# Altium PCB PCB1.PcbDoc
Units mm, origin at the board's own origin, x right, y up, seen from the top; angles counter-clockwise.
Board outline 40 x 100 mm, 2 copper layers (Top Layer, Bottom Layer); 29 components, 22 nets, 85 pads, 5 vias.
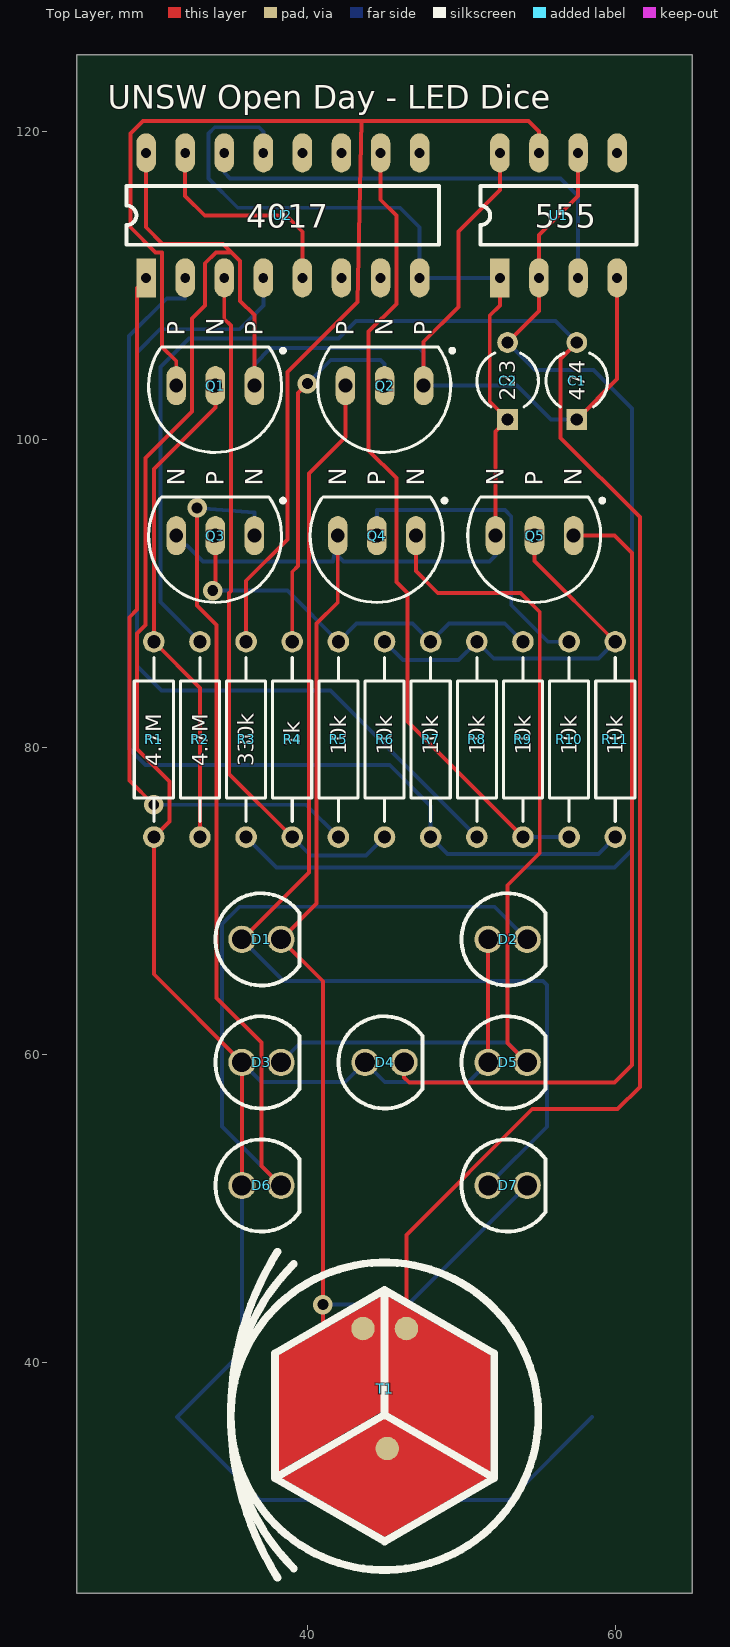
[diagram p0: Top Layer view]
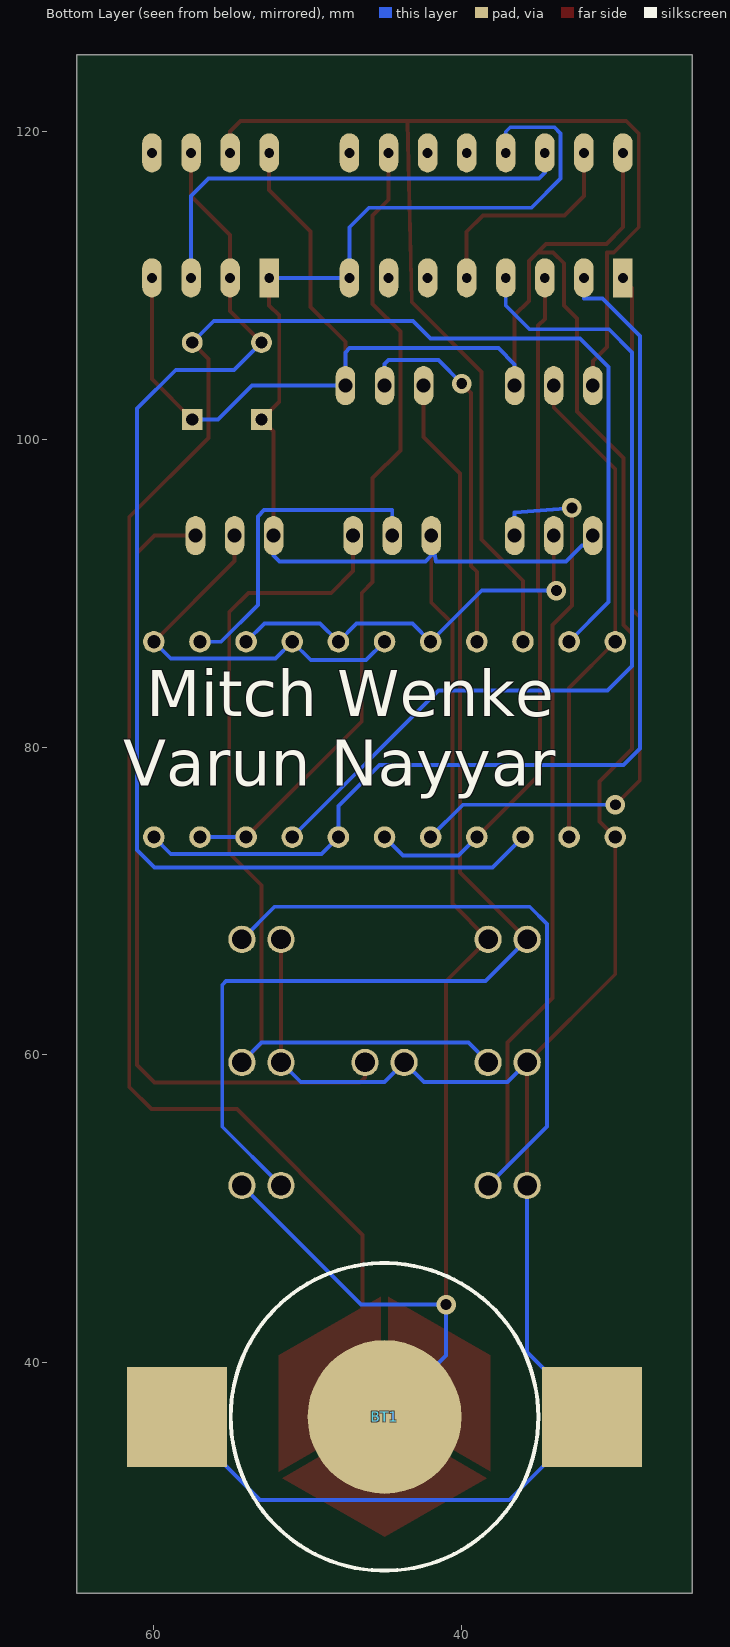
[diagram p1: Bottom Layer view, seen from below]

## Layer stack, top to bottom
Top Layer: signal copper 0.0356
Dielectric: dielectric 0.32, FR-4, Dk 4.8
Bottom Layer: signal copper 0.0356

## Board outline
25,25 65,25 65,125 25,125 25,25

## Design rules (kind name [scope] priority, off if disabled: settings)
AssemblyTestPointUsage [All] p1 off:
AssemblyTestpoint [All] p1 off: testpointundercomponent=TRUE minsize=1.016 maxsize=2.54 preferedsize=1.524 minholesize=0 maxholesize=1.016 preferedholesize=0.813 testpointgrid=0.025 usegrid=TRUE gridtolerance=0 allowsidetop=TRUE allowsidebottom=TRUE
Clearance [All] p1: gap=0.254
FabricationTestPointUsage [All] p1 off: valid=0 allowmultiple=FALSE
FabricationTestpoint [All] p1 off: side=3 testpointundercomponent=TRUE minsize=1.016 maxsize=2.54 preferedsize=1.524 minholesize=0 maxholesize=1.016 preferedholesize=0.813 testpointgrid=0.025 allowsidetop=TRUE allowsidebottom=TRUE usegrid=TRUE gridtolerance=0
PolygonConnect [All] p1: connectstyle=Relief reliefconductorwidth=0.254 reliefentries=4 polygonreliefangle="90 Angle"
RoutingVias [All] p1: holewidth=0.711 width=1.27 viastyle="Through Hole" minholewidth=0.711 minwidth=1.27 maxholewidth=0.711 maxwidth=1.27
SilkscreenOverComponentPads [All] p1: minsilkscreentomaskgap=0.029
SolderMaskExpansion [All] p1: expansion=0.102
Width [All] p1: maxlimit=2.54 minlimit=0.254 preferedwidth=0.254
23 further rules are at their usual default settings.

## Components (designator, comment, footprint, x,y, rotation, side; value= is the part's Value field where it differs from the comment)
BT1 "Battery" "CR2032 CLIP" 45,36.456 r0 bottom
C1 "Cap Pol2" CAPR5-4X5 57.5,103.8 r90 top
C2 "Cap" CAPR5-4X5 53,103.8 r90 top
D1 "LED" LED 37,67.5 r0 top
D2 "LED" LED 53,67.5 r0 top
D3 "LED" LED 37,59.5 r0 top
D4 "LED" LED 45,59.5 r0 top
D5 "LED" LED 53,59.5 r0 top
D6 "LED" LED 37,51.5 r0 top
D7 "LED" LED 53,51.5 r0 top
Q1 "BC557" PNP 34,103.5 r90 top
Q2 "BC557" PNP 45,103.5 r90 top
Q3 "BC547" NPN 34,93.75 r90 top
Q4 "BC547" NPN 44.5,93.75 r90 top
Q5 "BC547" NPN 54.75,93.75 r90 top
R1 "Res1" AXIAL-0.5 30,80.5 r270 top
R2 "Res1" AXIAL-0.5 33,80.5 r270 top
R3 "Res1" AXIAL-0.5 36,80.5 r90 top
R4 "Res1" AXIAL-0.5 39,80.5 r90 top
R5 "Res1" AXIAL-0.5 42,80.5 r90 top
R6 "Res1" AXIAL-0.5 45,80.5 r90 top
R7 "Res1" AXIAL-0.5 48,80.5 r90 top
R8 "Res1" AXIAL-0.5 51,80.5 r90 top
R9 "Res1" AXIAL-0.5 54,80.5 r90 top
R10 "Res1" AXIAL-0.5 57,80.5 r90 top
R11 "Res1" AXIAL-0.5 60,80.5 r90 top
T1 "TOUCH" PCBComponent_1 45,36.5 r0 top
U1 "555" 555 52.5,110.5 r90 top
U2 "CD4017" CD4017 29.5,110.5 r90 top

## Footprints (in the part's own frame and the unit in brackets; to place one, negate y for a bottom-side part, rotate by r counter-clockwise, add the part's x,y. Pads: shape width x height; smd on the part's side, far side on the other; paste and mask are expansions set on the pad)
555 [mil]
  rect 100x50 hole 25: 1(0,0)
  oval 100x50 hole 25: 2(0,-100) 3(0,-200) 4(0,-300) 5(320,-300) 6(320,-200) 7(320,-100) 8(320,0)
  silkscreen extent 85,-350 235,50
AXIAL-0.5 [mm] "Axial Device, Thru-Hole; 2 Leads; 0.5 in Pin Spacing"
  round 1.4 hole 0.85: 1(-6.35,0) 2(6.35,0)
  silkscreen extent -5.33,-1.27 5.33,1.27
CAPR5-4X5 [mm] "Capacitor; 2 Leads"
  rect 1.35x1.35 hole 0.8: 1(-2.5,0)
  round 1.35 hole 0.8: 2(2.5,0)
  silkscreen extent -1.69,-2 1.82,2
CD4017 [mil]
  rect 100x50 hole 25: 1(0,0)
  oval 100x50 hole 25: 2(0,-100) 3(0,-200) 4(0,-300) 5(0,-400) 6(0,-500) 7(0,-600) 8(0,-700) 9(320,-700) 10(320,-600) 11(320,-500) 12(320,-400) 13(320,-300) 14(320,-200) 15(320,-100) 16(320,0)
  silkscreen extent 85,-750 235,50
"CR2032 CLIP" [mm]
  rect 6.5x6.5 smd: 1(-13.5,0) 1(13.5,0)
  round 10 smd: 2(0,0)
  silkscreen extent -10,-10 10,10
LED [mil]
  round 70 hole 50: 1(-50,0) 2(50,0)
  silkscreen extent -118,-118 97,118
NPN [mm]
  oval 2.54x1.27 hole 0.9: 1(0,-2.54) 2(0,0) 3(0,2.54)
  silkscreen extent -4.34,-4.52 2.5,4.34
PCBComponent_1 [mm]
  round 1.524 smd: 1(-1.4,5.7) 1(0.175,-2.1) 2(1.425,5.7)
  Top Layer region: -6.65,-4.025 0,-0.175 6.65,-4.025 0,-7.85
  Top Layer region: 0.25,7.775 6.875,3.95 6.875,-3.6 0.25,0.225
  Top Layer region: -0.25,7.775 -0.25,0.25 -6.875,-3.575 -6.875,3.95
  silkscreen extent -10,-10.5 10,10.7
PNP [mm]
  oval 2.54x1.27 hole 0.9: 1(0,-2.54) 2(0,0) 3(0,2.54)
  silkscreen extent -4.34,-4.52 2.5,4.34

## Part data
BT1: "Multicell Battery"
C1: "Polarized Capacitor (Axial)"
C2: "Capacitor"
D1 D2 D3 D4 D5 D6 D7: library part LED0, "Typical INFRARED GaAs LED"
Q1 Q2: library part 2N3906, "PNP General Purpose Amplifier"
Q3 Q4 Q5: library part NPN, "NPN Bipolar Transistor"
R1 R2 R3 R4 R5 R6 R7 R8 R9 R10 R11: "Resistor"

## Via types
v1: diameter 1.27, hole 0.711, Top Layer to Bottom Layer, tented both sides, 5 vias

## Nets (pads, with @x,y where several pads share a name; then routed paths per layer and width w, separated by ;. In a path a pad name is that pad's centre, name@x,y a point inside that pad or via, vN(x,y) a via of type N, cw(c..) or ccw(c..) an arc to the next point about the centre after c; other vN are vias at no path point)
DICE1: R4.1 R6.1 U2.3 | length 45.3
  Top Layer w0.254: U2.3 34.58,107.838 35.016,107.402 35.016,90.134 34.9,90.018 34.9,78.25 R4.1
  Bottom Layer w0.254: R4.1 40.201,72.949 43.799,72.949 R6.1
DICE2: U2.7
DICE3: R8.1 U2.4 | length 58.4
  Bottom Layer w0.254: U2.4 37.12,108.712 35.571,107.163 30.404,107.163 28.905,105.664 28.905,85.268 30.505,83.668 41.482,83.668 R8.1
DICE4: R5.1 U2.1 | length 48.6
  Top Layer w0.254: U2.1 29.5,109.855 28.905,109.855 28.905,88.933 28.411,88.439 28.411,77.837 v1(29.997,76.251)
  Bottom Layer w0.254: v1(29.997,76.251) 39.899,76.251 R5.1
DICE5: R7.1 R11.1 U2.2 | length 68.9
  Bottom Layer w0.254: U2.2 32.04,109.176 30.842,109.176 28.397,106.731 28.397,79.908 29.464,78.842 45.339,78.842 48,76.181 R7.1 49.1,73.05 58.9,73.05 R11.1
DICE6: R9.1 R10.1 U2.10 | length 52.8
  Top Layer w0.254: U2.10 44.74,115.585 45.771,114.554 45.771,108.814 43.967,107.01 43.967,99.289 45.771,97.485 45.771,90.729 46.482,90.018 46.482,81.668 R9.1
  Bottom Layer w0.254: R9.1 R10.1
GND: BT1.2 C2.1 D1.2 D7.2 Q3.3 Q4.3 Q5.3 T1.1 U1.1 U2.8 U2.13 | length 174.8
  Top Layer w0.254: Q4.3 41.96,89.407 40.589,88.036 40.589,69.819 D1.2 40.996,64.774 v1(40.996,43.75) 40.996,38.579 43.6,35.975 ; T1.1@43.6,42.2 43.6,35.975 ; 47.825,31.75 45.175,34.4 43.6,35.975 ; Q5.3 52.21,100.51 C2.1 51.841,102.459 51.841,108.052 52.5,108.71 U1.1
  Bottom Layer w0.254: Q3.3 31.46,93.116 32.156,93.116 33.198,92.075 41.656,92.075 Q4.3 41.96,92.456 42.341,92.075 51.829,92.075 52.21,92.456 Q5.3 ; U2.13 37.12,120.004 36.83,120.294 33.96,120.294 33.553,119.888 33.553,116.967 35.458,115.062 46.01,115.062 47.28,113.792 U2.8 U1.1 ; BT1.2 40.996,40.46 v1(40.996,43.75) 46.52,43.75 D7.2
NetC1_2: C1.2 R2.1 T1.2 | length 124
  Top Layer w0.254: T1.2 46.425,48.289 54.6,56.464 60.147,56.464 61.595,57.912 61.595,94.945 56.439,100.101 56.439,105.239 C1.2
  Bottom Layer w0.254: R2.1 30.429,89.421 30.429,104.699 32.283,106.553 42.012,106.553 43.155,107.696 56.104,107.696 C1.2
NetC2_2: C2.2 R3.1 U1.2 U1.6 | length 79.2
  Top Layer w0.254: C2.2 55.04,108.34 U1.2 55.04,113.284 57.58,115.824 U1.6
  Bottom Layer w0.254: R3.1 37.989,72.161 59.944,72.161 61.087,73.304 61.087,102.006 58.572,104.521 54.779,104.521 C2.2
NetD1_1: D1.1 D7.1 Q2.3 | length 74.5
  Top Layer w0.254: D1.1 40.081,71.851 40.081,97.79 42.46,100.169 Q2.3
  Bottom Layer w0.254: D1.1 38.435,64.795 55.296,64.795 55.55,64.541 55.55,55.32 D7.1
NetD2_2: D2.2 D6.2 Q3.1 | length 91.3
  Top Layer w0.254: v1(32.817,95.555) 32.817,89.205 34.087,87.935 34.087,63.695 37,60.782 37,52.77 D6.2
  Bottom Layer w0.254: v1(32.817,95.555) 36.54,95.25 Q3.1 ; D6.2 34.442,55.328 34.442,68.504 35.56,69.621 52.149,69.621 D2.2
NetD3_2: D3.2 D5.2 Q4.1 | length 59.2
  Top Layer w0.254: Q4.1 47.04,91.44 48.462,90.018 53.848,90.018 55.093,88.773 55.093,73.111 53,71.018 53,60.77 D5.2
  Bottom Layer w0.254: D3.2 39.552,60.782 52.988,60.782 D5.2
NetD4_2: D4.2 Q5.1 | length 53.9
  Top Layer w0.254: D4.2 46.27,58.53 46.609,58.191 59.944,58.191 61.087,59.334 61.087,92.608 59.944,93.751 57.29,93.751 Q5.1
NetQ1_2: Q1.2 R1.1 R2.2 | length 32.2
  Top Layer w0.254: R2.2 33,83.85 R1.1 30,98.083 34,102.083 Q1.2
NetQ1_3: Q1.3 R3.2 U1.7 | length 83.3
  Top Layer w0.254: Q1.3 31.46,105.09 30.531,106.02 30.531,112.166 30.099,112.166 28.473,113.792 28.473,119.888 29.286,120.701 43.51,120.701 ; R3.2 36,90.813 38.684,93.497 38.684,104.394 43.231,108.941 43.51,120.701 ; U1.7 55.04,120.017 54.356,120.701 43.51,120.701
NetQ2_2: Q2.2 R4.2 | length 24.3
  Top Layer w0.254: R4.2 39,91.4 39.37,91.77 39.37,103.022 v1(39.98,103.632)
  Bottom Layer w0.254: v1(39.98,103.632) 41.504,105.156 44.746,105.156 45,104.902 Q2.2
NetQ3_2: Q3.2 R5.2 R7.2 R9.2 | length 27.2
  Top Layer w0.254: v1(33.833,90.17) 34,90.337 Q3.2
  Bottom Layer w0.254: v1(33.833,90.17) 38.68,90.17 R5.2 43.186,88.036 46.814,88.036 R7.2 49.186,88.036 52.814,88.036 R9.2
NetQ4_2: Q4.2 R10.2 | length 21.1
  Bottom Layer w0.254: Q4.2 44.5,95.402 52.832,95.402 53.238,94.996 53.238,89.23 55.619,86.85 R10.2
NetQ5_2: Q5.2 R6.2 R8.2 R11.2 | length 26
  Top Layer w0.254: Q5.2 54.75,92.1 R11.2
  Bottom Layer w0.254: R6.2 46.201,85.649 49.799,85.649 R8.2 52.1,85.75 58.9,85.75 R11.2
NetU1_3: U1.3 U2.14 | length 30.2
  Bottom Layer w0.254: U2.14 34.58,117.348 34.961,116.967 56.437,116.967 57.58,115.824 U1.3
NetU2_5: U2.5 U2.15 | length 14.4
  Top Layer w0.254: U2.15 32.04,115.824 33.31,114.554 38.608,114.554 39.66,113.502 U2.5
VCC: BT1.1 C1.1 D2.1 D3.1 D4.1 D5.1 D6.1 Q1.1 Q2.1 R1.2 U1.4 U1.8 U2.16 | length 215.6
  Top Layer w0.254: U2.16 29.5,113.792 30.578,112.714 34.504,112.714 35.052,112.166 ; D6.1 D3.1 30,65.23 R1.2 31.013,75.163 31.013,77.775 28.919,79.869 28.919,87.39 29.464,87.935 29.464,98.806 32.487,101.829 32.487,107.874 33.325,108.712 33.325,111.455 34.036,112.166 35.052,112.166 ; Q1.1 36.54,108.077 35.611,109.006 35.611,111.608 35.052,112.166 ; Q2.1 47.54,106.35 49.809,108.619 49.809,113.514 52.5,116.205 U1.8 ; D5.1 D2.1 ; C1.1 60.12,103.92 U1.4
  Bottom Layer w0.254: D6.1 35.73,40.686 31.5,36.456 36.891,31.064 53.109,31.064 BT1.1@58.5,36.456 ; D3.1 37.013,58.217 42.447,58.217 D4.1 45.013,58.217 50.447,58.217 D5.1 ; Q1.1 36.54,104.881 37.592,105.933 47.271,105.933 47.54,105.664 Q2.1 53.624,103.5 55.824,101.3 C1.1
pads on no net: U1.5 U2.6 U2.9 U2.11 U2.12

## Silkscreen, mask and mechanical layers (free items; w line width, h text height)
Top Overlay:
  text "UNSW Open Day - LED Dice" at 27,121.5 h1.52
  text "4017" at 36,113.75 h1.52
  text "555" at 54.75,113.75 h1.52
  text "223" at 53.5,102.5 h1.02 r90
  text "474" at 58,102.5 h1.02 r90
  text "1k" at 39.5,80 h1.02 r90
  text "10k" at 42.5,79.5 h1.02 r90
  text "10k" at 45.5,79.5 h1.02 r90
  text "10k" at 48.5,79.5 h1.02 r90
  text "10k" at 51.5,79.5 h1.02 r90
  text "10k" at 54.5,79.5 h1.02 r90
  text "10k" at 57.5,79.5 h1.02 r90
  text "10k" at 60.5,79.5 h1.02 r90
  text "4.7M" at 30.5,78.75 h1.02 r90
  text "4.7M" at 33.5,78.75 h1.02 r90
  text "330k" at 36.5,78.75 h1.02 r90
Bottom Overlay:
  text "Mitch Wenke" at 60.5,82 h3
  text "Varun Nayyar" at 62,77.5 h3

## Text inside footprints (layer, text, board x,y; h text height)
Q1: Top Overlay "P" at 32,106.75 h1.14 r90; Top Overlay "N" at 34.54,106.75 h1.14 r90; Top Overlay "P" at 37.08,106.75 h1.14 r90
Q2: Top Overlay "P" at 43,106.75 h1.14 r90; Top Overlay "N" at 45.54,106.75 h1.14 r90; Top Overlay "P" at 48.08,106.75 h1.14 r90
Q3: Top Overlay "N" at 32,97 h1.14 r90; Top Overlay "P" at 34.54,97 h1.14 r90; Top Overlay "N" at 37.08,97 h1.14 r90
Q4: Top Overlay "N" at 42.5,97 h1.14 r90; Top Overlay "P" at 45.04,97 h1.14 r90; Top Overlay "N" at 47.58,97 h1.14 r90
Q5: Top Overlay "N" at 52.75,97 h1.14 r90; Top Overlay "P" at 55.29,97 h1.14 r90; Top Overlay "N" at 57.83,97 h1.14 r90